# Altium PCB PCB1.PcbDoc (part 2 of 4)
Units mil, origin at the board's own origin, x right, y up, seen from the top; angles counter-clockwise.
Board outline 5315 x 3730 mil, 2 copper layers (Top Layer, Bottom Layer); 713 components, 554 nets, 2458 pads, 0 vias.
Unrouted connection lines stored in the file: 1728.
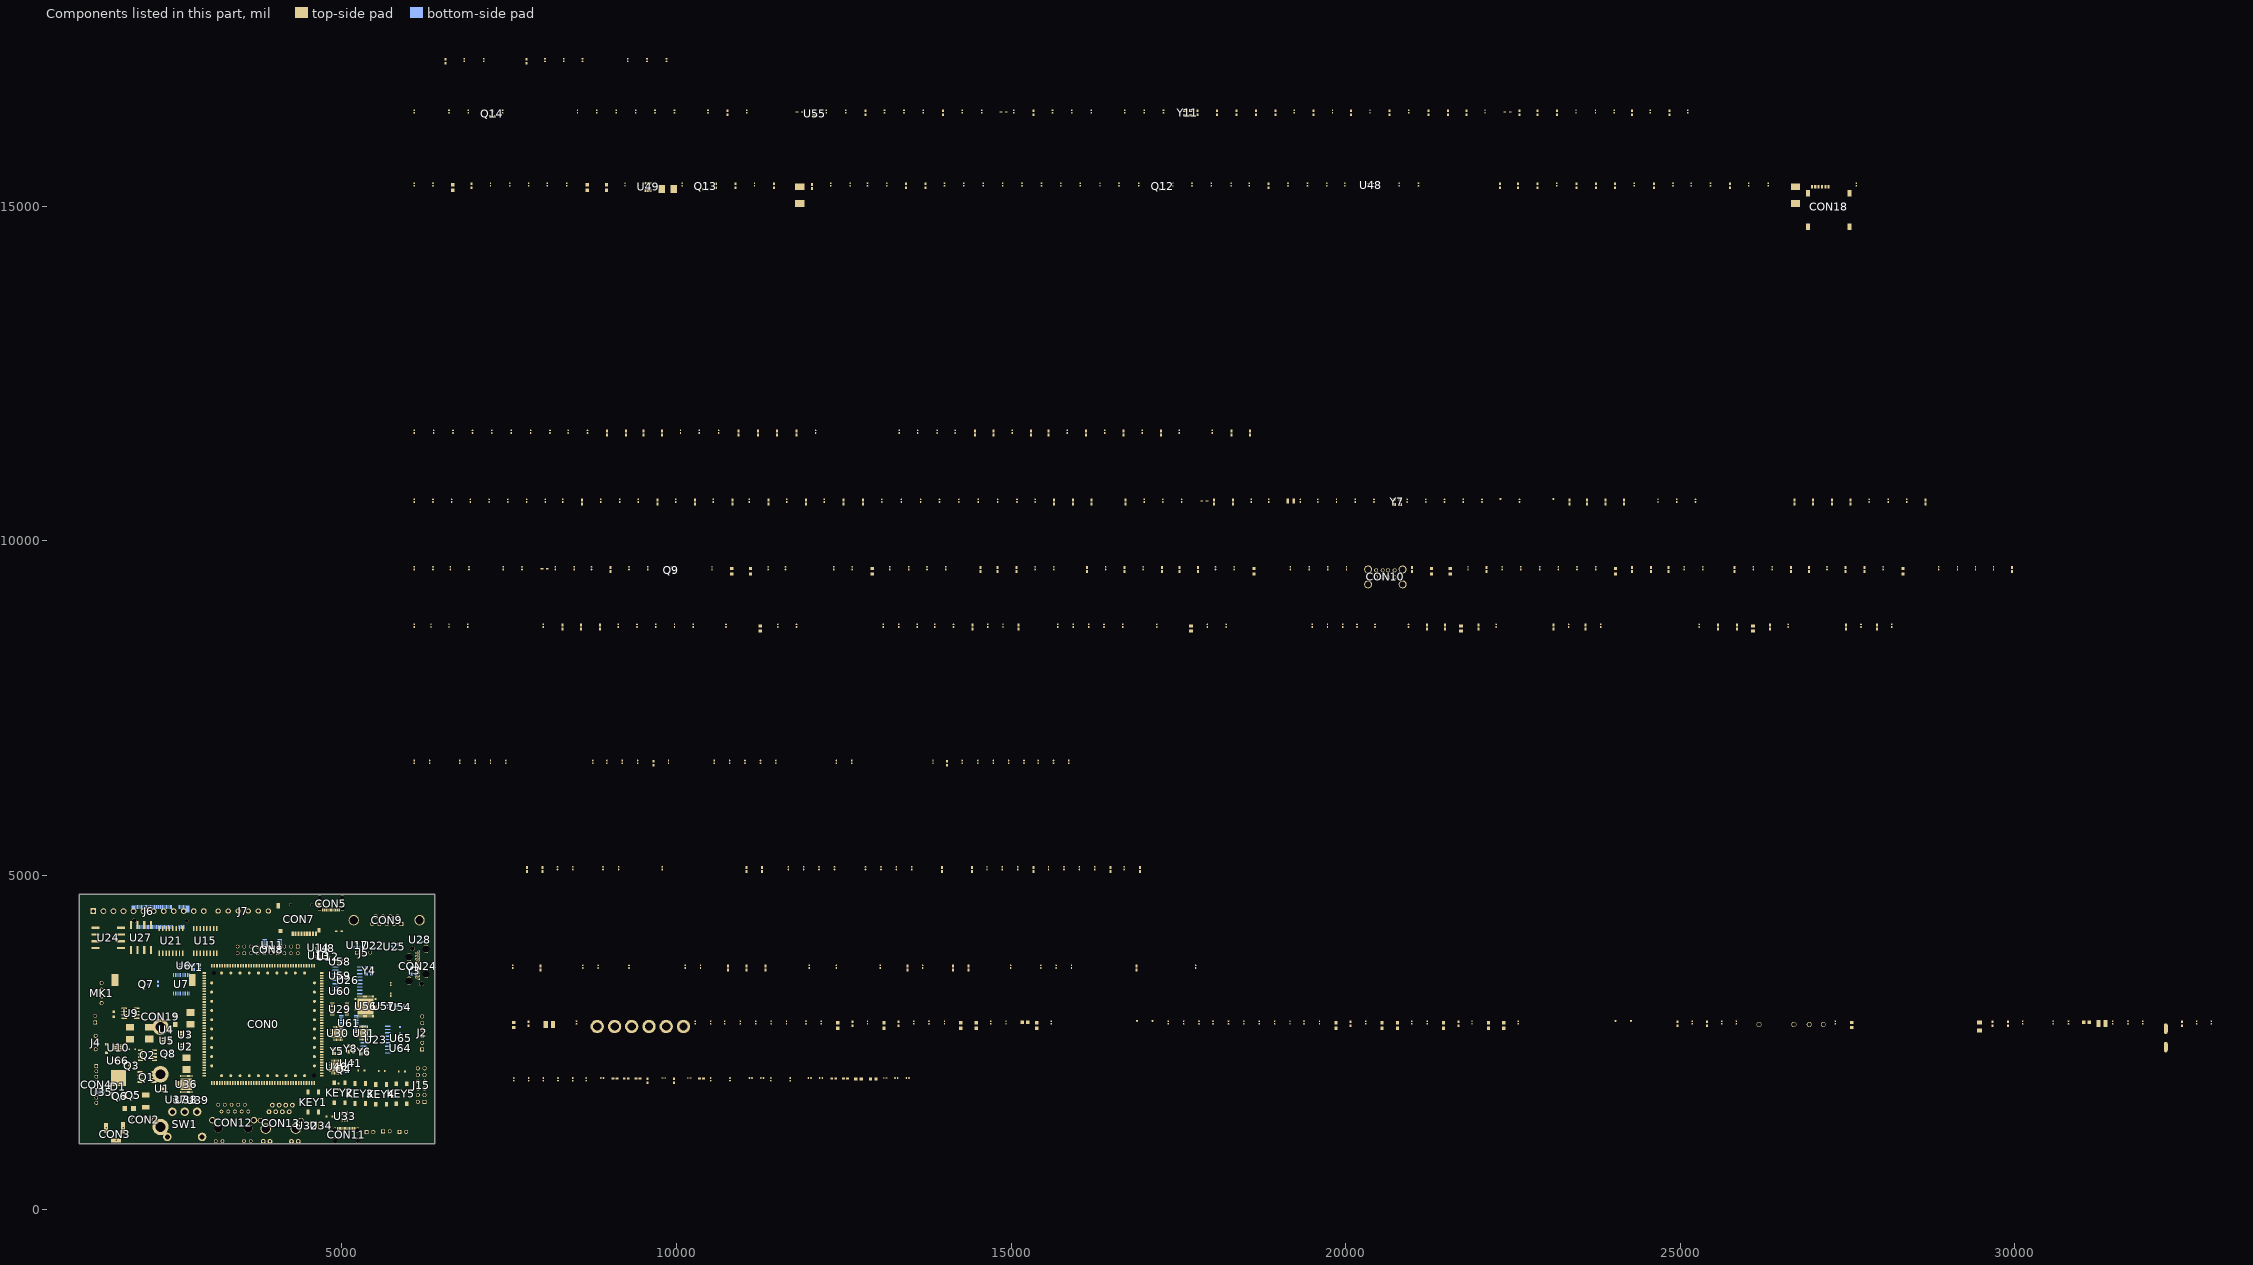
[diagram p2: the components of this part, seen from the top]

## Footprints (in the part's own frame and the unit in brackets; to place one, negate y for a bottom-side part, rotate by r counter-clockwise, add the part's x,y. Pads: shape width x height; smd on the part's side, far side on the other; paste and mask are expansions set on the pad) (continued)
D0603 [mil] "D0603"
  rect 40.2x29.9 smd: 1(-29.9,0) 2(29.9,0)
  silkscreen extent -60,-30 70,30
DFN2X2-8L [mil] "DFN2X2-8L"
  rect 10x20 smd: 1(-29.5,-39.4) 2(-9.8,-39.4) 3(9.8,-39.4) 4(29.5,-39.4) 5(29.5,39.4) 6(9.8,39.4) 7(-9.8,39.4) 8(-29.5,39.4)
  rect 70x40 smd: 9(0,0)
  silkscreen extent -47,-96 47,61
DFN-10-2510 [mil] "DFN-10-2510"
  rect 10x26 smd: 1(-39.4,-17.2) 5(39.4,-17.2) 6(39.4,17.2) 10(-39.4,17.2)
  rect 8x26 smd: 2(-19.7,-17.2) 4(19.7,-17.2) 7(19.7,17.2) 9(-19.7,17.2)
  rect 16x26 smd: 3(0,-17.2) 8(0,17.2)
  silkscreen extent -57,-67 57,41
DIP4_B0505S_1W [mil] "DIP4_B0505S_1W"
  round 59.1 hole 39.4: 1(-149.99,-82.7) 2(-49.99,-82.7) 3(50.01,-82.7) 4(150.01,-82.7)
  silkscreen extent -250,-140 228,118
DIP_CON_2D0MM_8P [mil] "DIP_CON_2D0MM_8P"
  rect 55x55 / inner round 55 / far side rect 55x55 hole 36: 1(275.6,-21.65)
  round 55 hole 36: 2(196.9,-21.65) 3(118.1,-21.65) 4(39.4,-21.65) 5(-39.4,-21.65) 6(-118.1,-21.65) 7(-196.9,-21.65) 8(-275.6,-21.65)
  silkscreen extent -359,-122 359,94
DIP_HDMI-A [mil] "DIP_HDMI-A"
  round 36 hole 22: 1(21.71,-49.25) 2(-17.69,-26.45) 3(21.71,-3.75) 4(-17.69,18.95) 5(21.71,41.75) 6(-17.69,64.45) 7(21.71,87.15) 8(-17.69,109.95) 9(21.71,132.65) 10(-17.69,155.45) 11(21.71,178.15) 12(-17.69,200.85) 13(21.71,223.65) 14(-17.69,246.35) 15(21.71,269.05) 16(-17.69,291.85) 17(21.71,314.55) 18(-17.69,337.25) 19(21.71,360.05)
  oval 56x126 hole 106 slot 36 at 0 deg: MTG1(-125.89,275.55) MTG2(129.91,397.65) MTG3(129.91,23.65) MTG4(-125.89,-78.75)
  round 67 hole 67 unplated: ""(-76.69,397.65) ""(61.11,-124.05)
  silkscreen extent -151,-459 156,451
F1206 [mil] "F1206"
  rrect11% 70.8x70.8 smd: 1(-65,0) 2(65,0)
  silkscreen extent -14,-35 14,35
header_1x2p_2d54_male [mil] "HEADER_1X2P_2D54_MALE"
  rect 54x54 / inner round 54 / far side rect 54x54 hole 40: 1(-50,0)
  round 54 hole 40: 2(50,0)
  silkscreen extent -101,-75 99,50
header_2x6_2d54_male [mil] "HEADER_2X6_2D54_MALE"
  rect 60x60 hole 40: 1(-250,-50)
  round 60 hole 40: 2(-250,50) 3(-150,-50) 4(-150,50) 5(-50,-50) 6(-50,50) 7(50,-50) 8(50,50) 9(150,-50) 10(150,50) 11(250,-50) 12(250,50)
  silkscreen extent -300,-148 300,100
KF2EDGR-3d81-12P [mil] "KF2EDGR-3D81-12P"
  rect 85x85 / inner round 85 / far side rect 85x85 hole 55: 1(825,129.9)
  round 85 hole 55: 2(675,129.9) 3(525,129.9) 4(375,129.9) 5(225,129.9) 6(75,129.9) 7(-75,129.9) 8(-225,129.9) 9(-375,129.9) 10(-525,129.9) 11(-675,129.9) 12(-825,129.9)
  silkscreen extent -916,-181 950,225
kf2eg_3_81-6p [mil] "KF2EG_3_81-6P"
  round 79.2 hole 49.2: 1(-375.1,105) 2(-225.1,105) 3(-75.1,105) 4(74.9,105) 5(224.9,105) 6(374.9,105)
  silkscreen extent -490,-206 466,180
KRJ-320DNL_14P [mil] "KRJ-320DNL_14P"
  round 55.1 hole 35.4: 1(-225,355.9) 2(-175,255.9) 3(-125,355.9) 4(-75,255.9) 5(-25,355.9) 6(25,255.9) 7(75,355.9) 8(125,255.9) 9(175,355.9) 10(225,255.9) 11(-261,-187) 12(-161,-187) 13(161,-187) 14(261,-187)
  round 126 hole 126 unplated: 15(-225,5.9) 16(225,5.9)
  round 98.4 hole 66.9: 17(310,126) 18(-310,126)
  silkscreen extent -315,-419 315,419
L0603 [mil] "L0603"
  rect 40.2x29.9 smd: 1(-30,0.5) 2(30,0.5)
  silkscreen extent -58,-24 58,25
MHOLE_C200D125 [mil] "MHOLE_C200D125"
  round 200 hole 125: 1(0.01,0)
micro-sim [mil] "MICRO-SIM"
  rect 61x102.4 smd: 1(-311,222.85) 2(-311,-276.45) 3(311,-276.45) 4(311,222.85)
  rect 31.5x53.2 smd: C1(-199.6,318.25) C2(-99.6,318.25) C3(0.4,318.25) C5(-249.6,318.25) C6(-149.6,318.25) C7(-49.6,318.25)
  silkscreen extent -340,-345 311,335
mol22-23-2031 [mil] "MOL22-23-2031"
  rect 54x54 / inner round 54 / far side rect 54x54 hole 40: 1(-100,-3)
  round 54 hole 40: 2(0,-3) 3(100,-3)
  silkscreen extent -187,-125 150,125
PSOPSOP-8L [mil] "PSOPSOP-8L"
  rect 25x75 smd: 1(-75.01,-104.3) 2(-25.01,-104.3) 3(24.99,-104.3) 4(74.99,-104.3) 5(74.99,104.3) 6(24.99,104.3) 7(-25.01,104.3) 8(-75.01,104.3)
  silkscreen extent -98,-177 98,79
QFN28_5x5 [mil] "QFN28_5X5"
  rect 10x35 smd: 1(-59.1,-95.1) 2(-39.4,-95.1) 3(-19.7,-95.1) 4(0,-95.1) 5(19.7,-95.1) 6(39.4,-95.1) 7(59.1,-95.1) 15(59.1,93.9) 16(39.4,93.9) 17(19.7,93.9) 18(0,93.9) 19(-19.7,93.9) 20(-39.4,93.9) 21(-59.1,93.9)
  rect 35x10 smd: 8(94.5,-59.7) 9(94.5,-40) 10(94.5,-20.3) 11(94.5,-0.6) 12(94.5,19.1) 13(94.5,38.8) 14(94.5,58.5) 22(-94.5,58.5) 23(-94.5,38.8) 24(-94.5,19.1) 25(-94.5,-0.6) 26(-94.5,-20.3) 27(-94.5,-40) 28(-94.5,-59.7)
  rect 128x128 smd: 29(0,-0.6)
  silkscreen extent -98,-144 99,97
QFN32 [mil] "QFN32"
  oval 10x33 smd: 1(-69.05,-93.69) 2(-49.35,-93.69) 3(-29.65,-93.69) 4(-9.95,-93.69) 5(9.65,-93.69) 6(29.35,-93.69) 7(49.05,-93.69) 8(68.75,-93.69) 17(68.75,94.31) 18(49.05,94.31) 19(29.35,94.31) 20(9.65,94.31) 21(-9.95,94.31) 22(-29.65,94.31) 23(-49.35,94.31) 24(-69.05,94.31)
  oval 33x10 smd: 9(93.85,-68.59) 10(93.85,-48.89) 11(93.85,-29.19) 12(93.85,-9.49) 13(93.85,10.11) 14(93.85,29.81) 15(93.85,49.51) 16(93.85,69.21) 25(-94.15,69.21) 26(-94.15,49.51) 27(-94.15,29.81) 28(-94.15,10.11) 29(-94.15,-9.49) 30(-94.15,-29.19) 31(-94.15,-48.89) 32(-94.15,-68.59)
  rect 131.9x131.9 smd: 33(-0.15,0.31)
  silkscreen extent -99,-141 98,99
QFN48 [mil] "QFN48"
  oval 8x32 smd: 1(-86.59,-118.1) 2(-70.89,-118.1) 3(-55.09,-118.1) 4(-39.39,-118.1) 5(-23.59,-118.1) 6(-7.89,-118.1) 7(7.91,-118.1) 8(23.61,-118.1) 9(39.41,-118.1) 10(55.11,-118.1) 11(70.91,-118.1) 12(86.61,-118.1) 25(86.61,118.1) 26(70.91,118.1) 27(55.11,118.1) 28(39.41,118.1) 29(23.61,118.1) 30(7.91,118.1) 31(-7.89,118.1) 32(-23.59,118.1) 33(-39.39,118.1) 34(-55.09,118.1) 35(-70.89,118.1) 36(-86.59,118.1)
  oval 32x8 smd: 13(118.11,-86.6) 14(118.11,-70.9) 15(118.11,-55.1) 16(118.11,-39.4) 17(118.11,-23.6) 18(118.11,-7.9) 19(118.11,7.9) 20(118.11,23.6) 21(118.11,39.4) 22(118.11,55.1) 23(118.11,70.9) 24(118.11,86.6) 37(-118.09,86.6) 38(-118.09,70.9) 39(-118.09,55.1) 40(-118.09,39.4) 41(-118.09,23.6) 42(-118.09,7.9) 43(-118.09,-7.9) 44(-118.09,-23.6) 45(-118.09,-39.4) 46(-118.09,-55.1) 47(-118.09,-70.9) 48(-118.09,-86.6)
  rect 173x173 smd: 49(0,0)
  silkscreen extent -182,-182 183,181
QFN64_LT8912B [mil] "QFN64_LT8912B"
  rect 31.9x7.9 smd: 1(-148.2,119.1) 2(-148.2,103.4) 3(-148.2,87.6) 4(-148.2,71.9) 5(-148.2,56.1) 6(-148.2,40.4) 7(-148.2,24.6) 8(-148.2,8.9) 9(-148.2,-6.9) 10(-148.2,-22.6) 11(-148.2,-38.4) 12(-148.2,-54.1) 13(-148.2,-69.9) 14(-148.2,-85.6) 15(-148.2,-101.4) 16(-148.2,-117.1) 33(147,-117.1) 34(147,-101.4) 35(147,-85.6) 36(147,-69.9) 37(147,-54.1) 38(147,-38.4) 39(147,-22.6) 40(147,-6.9) 41(147,8.9) 42(147,24.6) 43(147,40.4) 44(147,56.1) 45(147,71.9) 46(147,87.6) 47(147,103.4) 48(147,119.1)
  rect 7.9x31.9 smd: 17(-118.7,-146.6) 18(-103,-146.6) 19(-87.2,-146.6) 20(-71.5,-146.6) 21(-55.7,-146.6) 22(-40,-146.6) 23(-24.2,-146.6) 24(-8.5,-146.6) 25(7.3,-146.6) 26(23,-146.6) 27(38.8,-146.6) 28(54.5,-146.6) 29(70.3,-146.6) 30(86,-146.6) 31(101.8,-146.6) 32(117.5,-146.6) 49(117.5,148.6) 50(101.8,148.6) 51(86,148.6) 52(70.3,148.6) 53(54.5,148.6) 54(38.8,148.6) 55(23,148.6) 56(7.3,148.6) 57(-8.5,148.6) 58(-24.2,148.6) 59(-40,148.6) 60(-55.7,148.6) 61(-71.5,148.6) 62(-87.2,148.6) 63(-103,148.6) 64(-118.7,148.6)
  rect 244.1x244.1 smd: 65(-0.6,1)
  silkscreen extent -199,-147 147,149
QFN1616-12L [mil] "QFN1616-12L"
  rect 31x8 smd: 1(27.6,-8.5) 2(27.6,7.3) 7(-27.6,7.3) 8(-27.6,-8.5)
  rect 8x24 smd: 3(23.6,30.9) 4(7.9,30.9) 5(-7.9,30.9) 6(-23.6,30.9) 9(-23.6,-32.1) 10(-7.9,-32.1) 11(7.9,-32.1) 12(23.6,-32.1)
  silkscreen extent -32,-32 65,31
R0402 [mil] "R0402"
  oct 25x25 smd: 1(19.7,0) 2(-19.7,0)
  silkscreen extent -39,-20 39,20
R0603 [mil] "R0603"
  rect 40.2x29.9 smd: 1(30,0) 2(-30,0)
  silkscreen extent -59,-23 59,23
R0805 [mil] "R0805"
  rect 45x55 smd: 1(-37.5,0) 2(37.5,0)
  silkscreen extent -80,-35 80,35
R1210 [mil] "R1210"
  rect 59.1x98.4 smd: 1(-51.2,0) 2(51.2,0)
  silkscreen extent -87,-55 87,55
SC70-5-43M [mm] "SC70-5-43M"
  rect 0.95x0.401 smd: 1(-1.074,0.65) 2(-1.074,0) 3(-1.074,-0.65) 4(1.074,-0.65) 5(1.074,0.65)
  silkscreen extent -2.35,-1.1 1.8,1.1
SMB [mil] "SMB"
  rect 70x110 smd: 1(-90,0) 2(90,0)
  silkscreen extent -140,-80 140,80
SMD-L2520M-2P [mil] "SMD-L2520M-2P"
  rect 39.4x78.7 smd: 1(-43.3,0) 2(43.3,0)
  silkscreen extent -69,-45 69,45
SMD_200P_45x45_TL3562 [mil] "SMD_200P_45X45_TL3562"
  rect 24x55 smd: 1(-767.72,-877.95) 2(-728.35,-877.95) 3(-688.98,-877.95) 4(-649.61,-877.95) 5(-610.24,-877.95) 6(-570.87,-877.95) 7(-531.5,-877.95) 8(-492.13,-877.95) 9(-452.76,-877.95) 10(-413.39,-877.95) 11(-374.02,-877.95) 12(-334.65,-877.95) 13(-295.28,-877.95) 14(-255.91,-877.95) 15(-216.54,-877.95) 16(-177.17,-877.95) 17(-137.8,-877.95) 18(-98.43,-877.95) 19(-59.06,-877.95) 20(-19.69,-877.95) 21(19.68,-877.95) 22(59.05,-877.95) 23(98.42,-877.95) 24(137.79,-877.95) 25(177.17,-877.95) 26(216.54,-877.95) 27(255.91,-877.95) 28(295.28,-877.95) 29(334.65,-877.95) 30(374.02,-877.95) 31(413.39,-877.95) 32(452.76,-877.95) 33(492.13,-877.95) 34(531.5,-877.95) 35(570.87,-877.95) 36(610.24,-877.95) 37(649.61,-877.95) 38(688.98,-877.95) 39(728.35,-877.95) 40(767.72,-877.95) 81(767.72,877.95) 82(728.35,877.95) 83(688.98,877.95) 84(649.61,877.95) 85(610.24,877.95) 86(570.87,877.95) 87(531.5,877.95) 88(492.13,877.95) 89(452.76,877.95) 90(413.39,877.95) 91(374.02,877.95) 92(334.65,877.95) 93(295.28,877.95) 94(255.91,877.95) 95(216.54,877.95) 96(177.17,877.95) 97(137.79,877.95) 98(98.42,877.95) 99(59.05,877.95) 100(19.68,877.95) 101(-19.69,877.95) 102(-59.06,877.95) 103(-98.43,877.95) 104(-137.8,877.95) 105(-177.17,877.95) 106(-216.54,877.95) 107(-255.91,877.95) 108(-295.28,877.95) 109(-334.65,877.95) 110(-374.02,877.95) 111(-413.39,877.95) 112(-452.76,877.95) 113(-492.13,877.95) 114(-531.5,877.95) 115(-570.87,877.95) 116(-610.24,877.95) 117(-649.61,877.95) 118(-688.98,877.95) 119(-728.35,877.95) 120(-767.72,877.95)
  rect 55x24 smd: 41(877.95,-767.72) 42(877.95,-728.35) 43(877.95,-688.98) 44(877.95,-649.61) 45(877.95,-610.24) 46(877.95,-570.87) 47(877.95,-531.5) 48(877.95,-492.13) 49(877.95,-452.76) 50(877.95,-413.39) 51(877.95,-374.02) 52(877.95,-334.65) 53(877.95,-295.28) 54(877.95,-255.91) 55(877.95,-216.54) 56(877.95,-177.17) 57(877.95,-137.79) 58(877.95,-98.42) 59(877.95,-59.05) 60(877.95,-19.68) 61(877.95,19.69) 62(877.95,59.06) 63(877.95,98.43) 64(877.95,137.8) 65(877.95,177.17) 66(877.95,216.54) 67(877.95,255.91) 68(877.95,295.28) 69(877.95,334.65) 70(877.95,374.02) 71(877.95,413.39) 72(877.95,452.76) 73(877.95,492.13) 74(877.95,531.5) 75(877.95,570.87) 76(877.95,610.24) 77(877.95,649.61) 78(877.95,688.98) 79(877.95,728.35) 80(877.95,767.72) 121(-877.95,767.72) 122(-877.95,728.35) 123(-877.95,688.98) 124(-877.95,649.61) 125(-877.95,610.24) 126(-877.95,570.87) 127(-877.95,531.5) 128(-877.95,492.13) 129(-877.95,452.76) 130(-877.95,413.39) 131(-877.95,374.02) 132(-877.95,334.65) 133(-877.95,295.28) 134(-877.95,255.91) 135(-877.95,216.54) 136(-877.95,177.17) 137(-877.95,137.8) 138(-877.95,98.43) 139(-877.95,59.06) 140(-877.95,19.69) 141(-877.95,-19.68) 142(-877.95,-59.05) 143(-877.95,-98.42) 144(-877.95,-137.79) 145(-877.95,-177.17) 146(-877.95,-216.54) 147(-877.95,-255.91) 148(-877.95,-295.28) 149(-877.95,-334.65) 150(-877.95,-374.02) 151(-877.95,-413.39) 152(-877.95,-452.76) 153(-877.95,-492.13) 154(-877.95,-531.5) 155(-877.95,-570.87) 156(-877.95,-610.24) 157(-877.95,-649.61) 158(-877.95,-688.98) 159(-877.95,-728.35) 160(-877.95,-767.72)
  round 44 smd: 161(-620.08,-767.72) 162(-482.28,-767.72) 163(-344.49,-767.72) 164(-206.69,-767.72) 165(-68.9,-767.72) 166(68.9,-767.72) 167(206.69,-767.72) 168(344.49,-767.72) 169(482.28,-767.72) 170(620.08,-767.72) 171(767.72,-620.08) 172(767.72,-482.28) 173(767.72,-344.49) 174(767.72,-206.69) 175(767.72,-68.9) 176(767.72,68.9) 177(767.72,206.69) 178(767.72,344.49) 179(767.72,482.28) 180(767.72,620.08) 181(620.08,767.72) 182(482.28,767.72) 183(344.49,767.72) 184(206.69,767.72) 185(68.9,767.72) 186(-68.9,767.72) 187(-206.69,767.72) 188(-344.49,767.72) 189(-482.28,767.72) 190(-620.08,767.72) 191(-767.72,620.08) 192(-767.72,482.28) 193(-767.72,344.49) 194(-767.72,206.69) 195(-767.72,68.9) 196(-767.72,-68.9) 197(-767.72,-206.69) 198(-767.72,-344.49) 199(-767.72,-482.28) 200(-767.72,-620.08)
  round 20 hole 59 unplated: ""(-735.74,765.85) ""(762.26,-764.15)
  silkscreen extent -886,-886 886,886
SMD_2012 [mil] "SMD_2012"
  rect 39.4x43.3 smd: 1(-37.4,-0.2) 2(37.4,-0.2)
  silkscreen extent -63,-30 63,29
SMD_3225 [mil] "SMD_3225"
  rect 51.2x43.3 smd: 1(-45.29,-35.41) 2(45.31,-35.41) 3(45.31,35.39) 4(-45.29,35.39)
  silkscreen extent -90,-49 63,49
SMD_CSAB0518 [mil] "SMD_CSAB0518"
  rect 100x120 smd: 1(-88.6,0) 2(88.6,0)
  silkscreen extent -106,-106 106,106
SOD323_BI [mil] "SOD323_BI"
  rect 27.6x27.6 smd: 1(-45.3,0.1) 2(45.3,0.1)
  silkscreen extent -55,-27 48,27
SOD-123_NEW [mil] "SOD-123_NEW"
  rect 36x48 smd: 1(-65,0.5) 2(65,0.5)
  silkscreen extent -56,-36 56,36
SOD-323 [mil] "SOD-323"
  rect 40x20 smd: 1(39.9,-1.2) 2(-39.6,-1.2)
  silkscreen extent -76,-29 36,46
SOIC8_D8 [mil] "SOIC8_D8"
  rect 78.7x19.7 smd: 1(-94.5,75) 2(-94.5,25) 3(-94.5,-25) 4(-94.5,-75) 5(94.5,-75) 6(94.5,-25) 7(94.5,25) 8(94.5,75)
  silkscreen extent -165,-79 39,90
SOIC16 [mil] "SOIC16"
  rect 77x22 smd: 1(-185,173) 2(-185,123) 3(-185,73) 4(-185,23) 5(-185,-27) 6(-185,-77) 7(-185,-127) 8(-185,-177) 9(185.1,-177) 10(185.1,-127) 11(185.1,-77) 12(185.1,-27) 13(185.1,23) 14(185.1,73) 15(185.1,123) 16(185.1,173)
  silkscreen extent -265,-217 118,224
SOIC18 [mil] "SOIC18"
  rect 86.6x19.7 smd: 1(-181.1,199.99) 2(-181.1,149.99) 3(-181.1,99.99) 4(-181.1,49.99) 5(-181.1,-0.01) 6(-181.1,-50.01) 7(-181.1,-100.01) 8(-181.1,-150.01) 9(-181.1,-200.01) 10(181.1,-200.01) 11(181.1,-150.01) 12(181.1,-100.01) 13(181.1,-50.01) 14(181.1,-0.01) 15(181.1,49.99) 16(181.1,99.99) 17(181.1,149.99) 18(181.1,199.99)
  silkscreen extent -260,-229 147,229
SOP8 [mil] "SOP8"
  rect 120x32 smd: 1(-189,150) 2(-189,50) 3(-189,-50) 4(-189,-150) 5(189,-150) 6(189,-50) 7(189,50) 8(189,150)
  silkscreen extent -300,-188 255,188
SOP8-20-91 [mil] "SOP8-20-91"
  rect 10x37 smd: 1(29.3,55.3) 2(9.6,55.3) 3(-10,55.3) 4(-29.7,55.3) 5(-29.7,-55.7) 6(-10,-55.7) 7(9.6,-55.7) 8(29.3,-55.7)
  silkscreen extent -40,-46 39,98
SOT23-3 [mil] "SOT23-3"
  rect 30x30 smd: 1(-35,37.5) 2(-35,-37.5) 3(35,0.5)
  silkscreen extent -85,-58 25,58
SOT23-3_DBZ3 [mil] "SOT23-3_DBZ3"
  rect 25.6x40 smd: 1(-37.4,-39.4) 2(37.4,-39.4) 3(0,39.4)
  silkscreen extent -87,-52 60,28
SOT23-5 [mil] "SOT23-5"
  rect 25x50 smd: 1(-37.4,-49.19) 2(0,-49.19) 3(37.4,-49.19) 4(37.4,49.21) 5(-37.4,49.21)
  silkscreen extent -88,-79 60,34
sot23_8 [mil] "SOT23_8"
  rect 16.5x51.2 smd: 1(-38.05,-46.35) 2(-12.45,-46.35) 3(13.15,-46.35) 4(38.75,-46.35) 5(38.75,46.25) 6(13.15,46.25) 7(-12.45,46.25) 8(-38.05,46.25)
  silkscreen extent -55,-105 52,75
SOT363 [mil] "SOT363"
  rect 19.7x11.8 smd: 1(-37.5,24.5) 2(-37.5,-1.1) 3(-37.5,-26.7) 4(37.3,-26.7) 5(37.3,-1.1) 6(37.3,24.5)
  silkscreen extent -80,-32 22,40
SOT-23-6L [mil] "SOT-23-6L"
  rect 24x44 smd: 1(-37.59,-53.19) 2(-0.19,-53.19) 3(37.21,-53.19) 4(37.21,53.21) 5(-0.19,53.21) 6(-37.59,53.21)
  silkscreen extent -76,-88 61,39
sw-126_76 [mil] "SW-126_76"
  round 126 hole 76: 1(-185,170) 2(0,170) 3(185,170) 4(-260,-205.2) 5(260,-205.2)
  silkscreen extent -325,-270 325,310
TO-252 [mil] "TO-252"
  rect 50x105 smd: 1(-90.2,-165.8) 3(90.2,-165.8)
  rect 220x235 smd: 2(0,98)
  silkscreen extent -132,-248 132,156
TP30 [mil] "TP30"
  round 30 smd: 1(0,0)
TP_DIP [mil] "TP_DIP"
  round 74.8 hole 59.1: 1(0,0)
  silkscreen extent -69,-69 69,69
TS-1158B-B-B-W [mil] "TS-1158B-B-B-W"
  rect 71x47 smd: 1(-148.4,79.1) 2(148.8,79.1) 3(-148.4,-78.3) 4(148.8,-78.3)
  silkscreen extent -128,-126 128,126
TSSOP16 [mil] "TSSOP16"
  rect 65x13 smd: 1(-113,89.6) 2(-113,64) 3(-113,38.4) 4(-113,12.8) 5(-113,-12.8) 6(-113,-38.4) 7(-113,-64) 8(-113,-89.6) 9(113,-89.6) 10(113,-64) 11(113,-38.4) 12(113,-12.8) 13(113,12.8) 14(113,38.4) 15(113,64) 16(113,89.6)
  silkscreen extent -185,-100 80,105
TSSOP16_PW16 [mil] "TSSOP16_PW16"
  rect 63x11.8 smd: 1(-110.2,89.6) 2(-110.2,64) 3(-110.2,38.4) 4(-110.2,12.8) 5(-110.2,-12.8) 6(-110.2,-38.4) 7(-110.2,-64) 8(-110.2,-89.6) 9(110.2,-89.6) 10(110.2,-64) 11(110.2,-38.4) 12(110.2,-12.8) 13(110.2,12.8) 14(110.2,38.4) 15(110.2,64) 16(110.2,89.6)
  silkscreen extent -180,-79 59,105
TSSOP24 [mil] "TSSOP24"
  rect 65x13 smd: 1(-113,135.8) 2(-113,110.2) 3(-113,84.6) 4(-113,59) 5(-113,33.4) 6(-113,7.8) 7(-113,-17.8) 8(-113,-43.4) 9(-113,-69) 10(-113,-94.6) 11(-113,-120.2) 12(-113,-145.8) 13(113,-145.8) 14(113,-120.2) 15(113,-94.6) 16(113,-69) 17(113,-43.4) 18(113,-17.8) 19(113,7.8) 20(113,33.4) 21(113,59) 22(113,84.6) 23(113,110.2) 24(113,135.8)
  silkscreen extent -180,-160 80,150
TSSOP-20 [mil] "TSSOP-20"
  rect 65x13 smd: 1(-140,115.2) 2(-140,89.6) 3(-140,64) 4(-140,38.4) 5(-140,12.8) 6(-140,-12.8) 7(-140,-38.4) 8(-140,-64) 9(-140,-89.6) 10(-140,-115.2) 11(136,-115.2) 12(136,-89.6) 13(136,-64) 14(136,-38.4) 15(136,-12.8) 16(136,12.8) 17(136,38.4) 18(136,64) 19(136,89.6) 20(136,115.2)
  silkscreen extent -205,-145 93,145
TYPE-C_16P_90_SMD [mil] "TYPE-C_16P_90_SMD"
  oval 39x82 hole 67 slot 24 at 0 deg: 1(-171.25,115.5) 2(168.95,115.5)
  oval 39x70 hole 55 slot 24 at 0 deg: 3(-171.25,-47.9) 4(168.95,-47.9)
  rect 11x45 smd: A1(-132.65,138.2) A4(-101.15,138.2) A5(-50.35,138.2) A6(-10.95,138.2) A7(8.65,138.2) A8(48.05,138.2) A9(98.85,138.2) A12(130.35,138.2) B1(119.35,138.2) B4(87.85,138.2) B5(67.75,138.2) B6(28.35,138.2) B7(-30.65,138.2) B8(-70.05,138.2) B9(-90.15,138.2) B12(-121.65,138.2)
  round 20 hole 26 unplated: ""(-114.95,95.8) ""(112.65,95.8)
  silkscreen extent -185,-150 175,195
WLCSP-36-0d4mm [mil] "WLCSP-36-0D4MM"
  oval 6x9 smd: A1(-39.2,-39.4) A3(-39.2,-7.9) A4(-39.2,7.9) A6(-39.2,39.4) B1(-23.4,-39.4) B6(-23.4,39.4) C1(-7.7,-39.4) C6(-7.7,39.4) D1(8.1,-39.4) D6(8.1,39.4) E1(23.8,-39.4) E6(23.8,39.4) F1(39.6,-39.4) F3(39.6,-7.9) F4(39.6,7.9) F6(39.6,39.4)
  oval 9x6 smd: A2(-39.2,-23.6) A5(-39.2,23.6) F2(39.6,-23.6) F5(39.6,23.6)
  round 8 smd: B2(-23.4,-23.6) B3(-23.4,-7.9) B4(-23.4,7.9) B5(-23.4,23.6) C2(-7.7,-23.6) C3(-7.7,-7.9) C4(-7.7,7.9) C5(-7.7,23.6) D2(8.1,-23.6) D3(8.1,-7.9) D4(8.1,7.9) D5(8.1,23.6) E2(23.8,-23.6) E3(23.8,-7.9) E4(23.8,7.9) E5(23.8,23.6)
  silkscreen extent -53,-53 47,47

## Part data
C1 C2: library part "CAP NP_Dup3", "贴片陶瓷电容,680pF,5%,50V,COG", Dielectric=C0G, Manufacturer Character=中国大陆, Manufacturer PN=C1005C0G1H681J050BA, Operation Temperature（℃）=-55~125℃, Tolerance=5%, Voltage=50V, As-Welded=/, Created by=JJJ, Part Type=C0402, PCB Footprint=C0603, Priority=A, RK PN=C1005C0G1H681J050BA
C3 C4: library part "CAP NP_Dup3", "贴片陶瓷电容,100nF,10%,25V,X5R", Dielectric=X5R, Manufacturer Character=中国大陆, Manufacturer PN=C1005X5R1A104K050BA, Operation Temperature（℃）=-55~85℃, Tolerance=10%, Voltage=10V, As-Welded=/, Created by=JJJ, Part Type=C0402, PCB Footprint=C0402, Priority=A, RK PN=C1005X5R1A104K050BA
C5 C6: library part "CAP NP", "贴片陶瓷电容,22uF,20%,25V,X5R", Dielectric=X5R, Manufacturer Character=中国大陆, Manufacturer PN=C2012X5R1A226K125AB, Operation Temperature（℃）=-55~85℃, Tolerance=10%, Voltage=10V, As-Welded=/, Created by=JJJ, Part Type=C0805, PCB Footprint=C0805, Priority=A, RK PN=C2012X5R1A226K125AB
C7: library part "CAP NP", "贴片陶瓷电容,100nF,10%,25V,X5R", Dielectric=X5R, Manufacturer Character=中国大陆, Manufacturer PN=C1005X5R1A104K050BA, Operation Temperature（℃）=-55~85℃, Tolerance=10%, Voltage=10V, As-Welded=/, Created by=JJJ, Part Type=C0402, PCB Footprint=C0402, Priority=A, RK PN=C1005X5R1A104K050BA
C8 C9: library part "CAP NP_Dup3", "贴片陶瓷电容,33pF,5%,50V,COG", Dielectric=C0G, Manufacturer Character=中国大陆, Manufacturer PN=C1005C0G1H270J050BA, Operation Temperature（℃）=-55~125℃, Tolerance=5%, Voltage=50V, As-Welded=/, Created by=JJJ, Option=DNP, Part Type=C0402, PCB Footprint=C0603, Priority=A, RK PN=C1005C0G1H270J050BA
C10 C23 C27 C28 C30 C33 C34 C37 C41 C42 C48 C49 C113 C124 C125 C127 C264 C268 C269: library part "CAP NP_Dup3", "贴片陶瓷电容,22uF,20%,25V,X5R", Manufacturer Character=中国大陆, Operation Temperature（℃）=-55~85℃, Temperature=-55~125℃, As-Welded=/, PCB Footprint=C0805
  C113 C124 C125 C127: room="USB HUB"
C11 C20 C21 C26 C29 C32 C35 C36 C39 C43 C58 C59 C62 C66 C67 C71 C74 C78 C86 C95 C97 C108 C109 C110 C111 C112 C114 C115 C116 C126 C128 C129 C130 C246 C254 C255 C257 C260 C263 C266 C270 C329 C331 C334 C335: library part "CAP NP_Dup3", "贴片陶瓷电容,100nF,10%,25V,X5R", Manufacturer Character=中国大陆, Operation Temperature（℃）=-55~85℃, Temperature=-55~125℃, As-Welded=/, PCB Footprint=C0402
  C11: room=DCIN
  C78 C86: room=6
  C95 C97: room=17
  C108 C109 C110 C111 C112: room=RS232
  C114 C115 C116 C126 C128 C129 C130: room="USB HUB"
C12 C24 C31 C38 C46 C118 C132 C153 C157 C253 C265: library part "CAP NP_Dup3", "贴片陶瓷电容,1uF,10%,25V,X5R", Manufacturer Character=中国大陆, Operation Temperature（℃）=-55~85℃, PCB Footprint=C0603
  C12 C24 C31 C38 C157 C253 C265: As-Welded=/
  C46: As-Welded=/, Characteristic=<Characteristic>
  C118 C132: As-Welded=/, room="USB HUB"
  C153: As-Welded=DNP
C13: library part "CAP POL_Dup1", "贴片式铝电解电容,220uF,20%,35V", Manufacturer=东莞市合粤电子有限公司（Heyue）, Manufacturer Character=中国大陆, Manufacturer PartNumber=RVT1V221M0810VG, Operation Temperature（℃）=-55~105℃, As-Welded=/, PCB Footprint=cap_alu_smd_8x10d5, room=DCIN, Temperature=-55~105℃
C14 C64 C65 C79 C82 C87 C88: library part "CAP NP_Dup3", "贴片陶瓷电容,22pF,5%,50V,C0G", Manufacturer Character=中国大陆, Operation Temperature（℃）=-55~125℃, As-Welded=/, PCB Footprint=C0603, Temperature=-55~125℃
  C79 C82 C87 C88: room=6
C15: library part "CAP NP_Dup3", "贴片陶瓷电容,2.2uF,20%,25V,Y5V", Manufacturer Character=中国大陆, Operation Temperature（℃）=-20~85℃, As-Welded=/, PCB Footprint=C1206
C16 C18 C159 C161 C163 C165 C336: library part "CAP NP_Dup3", "贴片陶瓷电容,10uF,10%,10V,X5R", Manufacturer Character=中国大陆, Operation Temperature（℃）=-55~85℃, As-Welded=/, PCB Footprint=C0603
C17 C19 C56 C75 C76 C143 C144 C145 C147 C148 C151 C152 C154 C155 C156 C158 C160 C162 C164 C166 C243 C256 C337: library part "CAP NP_Dup3", "贴片陶瓷电容,100nF,10%,25V,X5R", Manufacturer Character=中国大陆, Operation Temperature（℃）=-55~85℃, As-Welded=/, PCB Footprint=C0402
  C243 C256: room="USB HUB"
C22 C25 C40 C267 C340: library part "CAP NP_Dup3", "贴片陶瓷电容,15pF,5%,50V,COG", Manufacturer Character=中国大陆, Operation Temperature（℃）=-55~125℃, As-Welded=/, PCB Footprint=C0402, Temperature=-55~125℃
C44: library part "CAP NP_Dup3", "贴片陶瓷电容,22uF,20%,25V,X5R", Manufacturer Character=中国大陆, Operation Temperature（℃）=-55~85℃, Temperature=-55~155℃, As-Welded=/, Characteristic=<Characteristic>, PCB Footprint=C0805
C45 C47 C50 C70: library part "CAP NP_Dup3", "贴片陶瓷电容,100nF,10%,25V,X5R", Manufacturer Character=中国大陆, Operation Temperature（℃）=-55~85℃, Temperature=-55~155℃, As-Welded=/, PCB Footprint=C0402
  C45 C47 C50: Characteristic=<Characteristic>
C51: library part "CAP NP_Dup3", "贴片陶瓷电容,1nF,10%,2KV,X7R", Manufacturer Character=中国大陆, Operation Temperature（℃）=-55~125℃, Temperature=–55~125℃, As-Welded=/, PCB Footprint=C1210
C52 C53 C54 C55 C57: library part "CAP NP_Dup2", "贴片陶瓷电容,10nF,10%,50V,X7R", Manufacturer Character=中国大陆, Operation Temperature（℃）=-55~125℃, As-Welded=/, PCB Footprint=C0402, room=KEY
  C54 C55 C57: Temperature=-55~125℃
C60 C249: library part "CAP NP_Dup3", "贴片陶瓷电容,10nF,10%,50V,X7R", Manufacturer Character=中国大陆, Operation Temperature（℃）=-55~125℃, Temperature=–55~125℃, As-Welded=/, PCB Footprint=C0402
C61 C63 C72 C73 C77 C85 C96 C98 C107 C247 C261: library part "CAP NP_Dup3", "贴片陶瓷电容,10uF,10%,10V,X5R", Manufacturer Character=中国大陆, Operation Temperature（℃）=-55~85℃, Temperature=-55~125℃, As-Welded=/, PCB Footprint=C0603
  C77 C85 C96 C98 C247 C261: room=6
  C107: room=RS232
C68 C69: library part "CAP NP_Dup3", "贴片陶瓷电容,18pF,5%,50V,C0G", Manufacturer Character=中国大陆, Operation Temperature（℃）=-55~125℃, Temperature=-40~125℃, As-Welded=DNP, PCB Footprint=C0603
C89 C90 C91 C94 C99 C100 C101 C106 C138 C141 C142: library part "CAP NP_Dup1", "贴片陶瓷电容,100nF,10%,25V,X5R", Manufacturer Character=中国大陆, Operation Temperature（℃）=-55~85℃, Temperature=-55~125℃, As-Welded=/, PCB Footprint=C0402
  C138 C141: room=DRDUSB
  C142: room="USB HUB"
C92 C93 C102 C103: library part "CAP NP_Dup1", "贴片陶瓷电容,15pF,5%,50V,COG", Manufacturer Character=中国大陆, Operation Temperature（℃）=-55~125℃, As-Welded=/, PCB Footprint=C0402, Temperature=-55~125℃
C104 C105: library part "CAP NP_Dup1", "贴片陶瓷电容,33pF,5%,50V,COG", Manufacturer Character=中国大陆, Operation Temperature（℃）=-55~125℃, As-Welded=/, PCB Footprint=C0603, Temperature=-55~125℃
C117 C119 C131 C133: library part "CAP NP_Dup3", "贴片陶瓷电容,22pF,5%,50V,COG", Manufacturer Character=中国大陆, Operation Temperature（℃）=-55~125℃, As-Welded=DNP, PCB Footprint=C0603, room="USB HUB", Temperature=-55~125℃
C120 C122 C123 C134 C135 C136: library part "CAP NP_Dup3", "100nF,10%,C0402,25V", Manufacturer Character=中国大陆, Operation Temperature（℃）=-40~85℃, Temperature=-55~125℃, As-Welded=DNP, PCB Footprint=C0402, room="USB HUB"
C121 C137: library part "CAP NP_Dup3", "贴片陶瓷电容,22uF,10%,16V,X5R", Manufacturer Character=中国大陆, Operation Temperature（℃）=-55~85℃, Temperature=-55~125℃, As-Welded=DNP, PCB Footprint=C0805, room="USB HUB"
C139 C140: library part "CAP NP_Dup1", "贴片陶瓷电容,22uF,20%,25V,X5R", Manufacturer Character=中国大陆, Operation Temperature（℃）=-55~85℃, Temperature=-55~125℃, As-Welded=/, PCB Footprint=C0805, room=DRDUSB
C146 C149: library part "CAP NP_Dup3", "贴片陶瓷电容,12pF,5%,50V,COG", Manufacturer Character=中国大陆, Operation Temperature（℃）=-55~125℃, As-Welded=/, PCB Footprint=C0402
C150: library part "CAP NP_Dup3", "贴片陶瓷电容,4.7uF,10%,25V,X5R", Manufacturer Character=中国大陆, Operation Temperature（℃）=-55~85℃, As-Welded=/, PCB Footprint=C0603
C167 C168: library part "CAP NP_2", "贴片陶瓷电容,12pF,5%,50V,COG", Manufacturer Character=中国大陆, Operation Temperature（℃）=-55~125℃, As-Welded=/, PCB Footprint=C0402, room=10
C169 C172: library part "CAP NP_2", "贴片陶瓷电容,10uF,10%,10V,X5R", Manufacturer Character=中国大陆, Operation Temperature（℃）=-55~85℃, As-Welded=/, PCB Footprint=C0603, room=10
C170 C173 C175 C177 C179: library part "CAP NP_2", "贴片陶瓷电容,100nF,10%,25V,X5R", Manufacturer Character=中国大陆, Operation Temperature（℃）=-55~85℃, As-Welded=/, PCB Footprint=C0402, room=10
C171 C174 C176 C178: library part "CAP NP_2", "贴片陶瓷电容,1uF,10%,25V,X5R", Manufacturer Character=中国大陆, Operation Temperature（℃）=-55~85℃, As-Welded=/, PCB Footprint=C0603, room=10
C180 C181 C182 C183: library part "CAP NP_3", "贴片陶瓷电容,15pF,5%,50V,COG", Manufacturer Character=中国大陆, Operation Temperature（℃）=-55~125℃, As-Welded=DNP, PCB Footprint=C0603, room=ecat1, Temperature=-55~125℃
C184: library part "CAP NP_3", "贴片陶瓷电容,100nF,10%,25V,X5R", Manufacturer Character=中国大陆, Operation Temperature（℃）=-55~85℃, Temperature=-55~125℃, As-Welded=/, PCB Footprint=C0402, room=ecat1
C244 C258: library part "CAP NP_Dup3", "贴片陶瓷电容,10pF,5%,50V,COG", Manufacturer Character=中国大陆, Operation Temperature（℃）=-55~125℃, As-Welded=/, PCB Footprint=C0603, Temperature=-55~125℃
C245 C259: library part "CAP NP_Dup3", "贴片陶瓷电容,33pF,5%,50V,COG", Manufacturer Character=中国大陆, Operation Temperature（℃）=-55~125℃, As-Welded=/, PCB Footprint=C0603, Temperature=-55~125℃
C248 C262: library part "CAP POL_Dup1", "D型钽电容,220uF,10%,10V", Manufacturer=湖南湘怡中元科技有限公司（XIANGYEE）, Manufacturer Character=中国大陆, Manufacturer PartNumber=CA45-D010K227T, Operation Temperature（℃）=-55~125℃, As-Welded=/, PCB Footprint=CAP_CASE_D, Temperature=-55~125℃
C250 C251 C252: library part "CAP NP_Dup3", "贴片陶瓷电容,33pF,5%,50V,COG", Manufacturer Character=中国大陆, Operation Temperature（℃）=-55~125℃, Temperature=-55~155℃, As-Welded=DNP, PCB Footprint=C0603
C308 C312 C314 C316 C317 C320 C322 C324 C326: library part CAP_NP0603, "贴片陶瓷电容,10uF,10%,10V,X5R", Manufacturer Character=中国大陆, Operation Temperature（℃）=-55~85℃, Part Number=117-00-3043, As-Welded=/, Create Date=20130122, Designer=Hujin, Part Status="On Hand", Part Type=CAPACITOR, PCB Footprint=C0603, PCB Footprint Status=Checked, Price=0.1, Purchase Information="13510796878 伊美尔电子", Standard PCB Footprint=0603
C309 C310 C311 C313 C315 C318 C319 C321 C323 C325 C330: library part CAP_NP0603, "贴片陶瓷电容,100nF,10%,25V,X5R", Manufacturer Character=中国大陆, Operation Temperature（℃）=-55~85℃, Part Number=117-00-3036, As-Welded=/, Create Date=20130122, Designer=Hujin, Part Status="On Hand", Part Type=CAPACITOR, PCB Footprint=C0402, PCB Footprint Status=Checked, Price=0.0072, Purchase Information="13510796878 伊美尔电子", Standard PCB Footprint=0603
C327 C328: library part CAP_NP0603, "贴片陶瓷电容,12pF,5%,50V,COG", Manufacturer Character=中国大陆, Operation Temperature（℃）=-55~125℃, Part Number=117-00-3002, As-Welded=/, Create Date=20130122, Designer=Hujin, Part Status="On Hand", Part Type=CAPACITOR, PCB Footprint=C0402, PCB Footprint Status=Checked, Price=0.0072, Purchase Information="13510796878 伊美尔电子", Standard PCB Footprint=0603
C332: library part CAP_NP, "贴片陶瓷电容,100nF,10%,25V,X5R", Manufacturer Character=中国大陆, Operation Temperature（℃）=-55~85℃, Part Number=117-00-3036, Temperature=-55~125℃, As-Welded=/, Part Status="On Hand", Part Type=CAPACITOR, PCB Footprint=C0402, PCB Footprint Status=Checked, Price=0.0072, Purchase Information="13510796878 伊美尔电子", Standard PCB Footprint=0603
C333: library part CAP_NP0603, "2.2nF,10%,C0603,50V,", Manufacturer Character=中国大陆, Operation Temperature（℃）=-40~85℃, Part Number=117-00-3023, As-Welded=/, Create Date=20130122, Designer=Hujin, Part Status="On Hand", Part Type=CAPACITOR, PCB Footprint=C0603, PCB Footprint Status=Checked, Price=0.0072, Purchase Information="13510796878 伊美尔电子", Standard PCB Footprint=0603
CON0: Manufacturer=广州创龙电子科技有限公司（Tronlong）, Manufacturer Character=中国大陆, Manufacturer PartNumber=SMD_200P_45x45_TL3562, Operation Temperature（℃）=-40~85℃, As-Welded=/, PCB Footprint=SMD_200P_45x45_TL3562
CON2: library part CON3_Dup1, "端子座,3PIN,间距3.81MM,90度,绿色,插件", Manufacturer=慈溪市科发电子有限公司（KEFA）, Manufacturer Character=中国大陆, Manufacturer PartNumber=KF2EDGR-3.81-03P-14, Operation Temperature（℃）=-40~105℃, As-Welded=/, PCB Footprint=CON_3P_3D81_90_MALE_NEW, room=17
CON3: "DC-005,3PIN,90度,母座,2.0MM内径,插件", Manufacturer=广东纳特康电子股份有限公司(natconn), Manufacturer Character=中国大陆, Manufacturer PartNumber=305-OT03SZD001, Operation Temperature（℃）=-30~70℃, Temperature=-30~70, As-Welded=/, PCB Footprint=con_dc005_new, room=dcin
CON4: library part CON8, "端子座,1x8PIN,间距2.00MM,180度,插件", Manufacturer=深圳市长江连接器有限公司（CJT）, Manufacturer Character=中国大陆, Manufacturer PartNumber=A2001WV-8P-3, Operation Temperature（℃）=-40~105℃, As-Welded=/, PCB Footprint=DIP_CON_2D0MM_8P
CON5 CON11: library part "usb 3_0.0 type-c female", "Type-C 母座 90度 16 Pin", Manufacturer=深圳市金航标电子有限公司(kinghelm), Manufacturer Character=中国大陆, Operation Temperature（℃）=-40~85℃, As-Welded=/, Manufacturer PartNumber=KH-TYPE-C-16P, PCB Footprint=TYPE-C_16P_90_SMD, room=10
CON6: library part BATTERY, "2032,纽扣电池座,2PIN,180度,白色,卧式,贴片", Manufacturer=深圳市琦捷电子有限公司（Q&J）, Manufacturer Character=中国大陆, Temperature=-55~85℃, As-Welded=/, Manufacturer PartNumber=CR2032-BS-6-1, PCB Footprint=CON_BATTERY_CR2032, room=4
CON7: library part "PROCONN SDC009-52-D_3", "Micro SD卡座,9PIN,90度,贴片，GE- T-FLASH PUSH TYPE外焊式外壳带弹片1.80H(3U)", Manufacturer=广州高炬电子科技有限公司(TORCH), Manufacturer Character=中国大陆, Operation Temperature（℃）=-40~85℃, As-Welded=/, Manufacturer PartNumber=1060802AR013, PCB Footprint=CON_TF_CARD, Temperature=-40~85℃
CON8: library part CON20A, "简易牛角座,2X10PIN,间距2.54MM,180度,公座,黑色,插件", Manufacturer=深圳特思嘉工业电子有限公司（TXGA）, Manufacturer Character=中国大陆, Manufacturer PartNumber=FBH25401-D20S1004K6K, Operation Temperature（℃）=-40~+105(Ta), As-Welded=/, PCB Footprint=con_2d54_2x10_th_box_90
CON9: library part DB9_1, "DB9,9PIN,90度,公头,黑色,插件", Manufacturer=深圳市灿科盟实业有限公司（ckmtw）, Manufacturer Character=中国大陆, Operation Temperature（℃）=-50~105℃, Temperature=-55~105℃, As-Welded=/, Manufacturer PartNumber=D-DMR009PM-D002, PCB Footprint=CON_DB9, room=RS232
CON10: library part "DOUBLE USB A TYPE", "USB-A-双层座,8PIN,90度,母座,插件", Manufacturer=深圳特思嘉工业电子有限公司（TXGA）, Manufacturer Character=中国大陆, Manufacturer PartNumber=FUS208-FDBW3K, Operation Temperature（℃）=-40~85℃, As-Welded=/, PCB Footprint=CON_USBA_DUAL, room="USB HUB"
CON12: library part KRJ-320DNL_1, "RJ45连接器,14PIN,90度,母座,插件", Manufacturer=东莞市科优达电子科技有限公司（DGKYD）, Manufacturer Character=中国大陆, Operation Temperature（℃）=-40~85℃, As-Welded=/, Manufacturer PartNumber=KRJ-320DNL, PCB Footprint=KRJ-320DNL_14P, Temperature=-40~85℃
CON13: library part "ETHERNET CONNECTER", "RJ45连接器,12PIN,90度,母座,插件", Manufacturer=东莞市科优达电子科技有限公司（DGKYD）, Manufacturer Character=中国大陆, Operation Temperature（℃）=-40~85℃, As-Welded=/, Manufacturer Part Number=KRJ-138EHNL, Manufacturer PartNumber=KRJ-138EHNL, PCB Footprint=CON_YDS_13F-64GYD2PLXNL, room=ecat1, Temperature=-40~85℃
CON18: library part SIM_CARD_2, "Micro SIM卡座,6P,自弹", Manufacturer="深圳市爱特姆科技有限公司( ATOM)", Manufacturer Character=中国大陆, Temperature=-40~85℃, As-Welded=/, Manufacturer PartNumber=SI63C-01200, PCB Footprint=micro-sim
CON19: library part CON_M_1, "NGFF（M.2）金手指连接器，KEY B,高4.2mm", Manufacturer=深圳市连欣科技有限公司, Manufacturer Character=中国大陆, As-Welded=/, Manufacturer PartNumber=APCI0105-P001A, PCB Footprint=conn-smd_apci0103-p001a
CON24: library part 2C_Conn_HDMI_TypeA, "HDMI接口，19PIN，侧立，90度", Manufacturer=深圳特思嘉工业电子有限公司（TXGA）, Manufacturer Character=中国大陆, Mfr=FCI, MfrNum=10029449-001RLF, Operation Temperature（℃）=-40~85℃, PartName=Conn_HDMI_A, Temperature=-25~75℃, TIIntPartnumber=2C0085, Cost10K=0.37, Cost100=0.91, DescriptiveText="Connector HDMI Type A RA", Manufacturer PartNumber=FHD14-FDB300K6K, PCB Footprint=SMD_Ratbd, Remark=HDMI接口，19PIN，侧立，90度, Vendor=Digikey
D1: library part MBRB1045_0, "肖特基二极管,VR=60V,IF=10A,VF=0.75V@5A,两路", Manufacturer=辽宁芯诺电子科技有限公司（XINNUO）, Manufacturer Character=中国大陆, Operation Temperature（℃）=-55~150℃, As-Welded=/, Manufacturer PartNumber=MBR1060CD, PCB Footprint=TO-252, Temperature=-55~150℃
D2: library part DIODE-TRIG, "TVS二极管,VRWM=16V,VBR=17.8V,一组,双向", Manufacturer=江苏长晶科技有限公司（JSCJ）, Manufacturer Character=中国大陆, Operation Temperature（℃）=-55~150℃, As-Welded=/, Manufacturer PartNumber=SMBJ16CA, PCB Footprint=SMB, room=DCIN, Temperature=-55~150℃
D3 D9 D23 D24: library part "DIODE BREAKDOWN_2", "TVS二极管,VRWM=5V,VBR=6V,一组,双向,30KV,30KV", Manufacturer=上海雷卯电子科技有限公司（Leiditech）, Manufacturer Character=中国大陆, Manufacturer Part Number=PESD3V3L1BA, Operation Temperature（℃）=-55~125℃, Temperature=-55~155℃, As-Welded=/, Manufacturer PartNumber=LC05CI, PCB Footprint=SOD323_BI, room=KEY
D4: library part DIODE-BI, "TVS二极管,VRWM=5V,VBR=6V,一组,双向,30KV,30KV", Manufacturer=上海雷卯电子科技有限公司（Leiditech）, Manufacturer Character=中国大陆, Manufacturer Part Number=PESD3V3L1BA, Operation Temperature（℃）=-55~125℃, Temperature=-55~155℃, As-Welded=/, Manufacturer PartNumber=LC05CI, PCB Footprint=SOD323_BI, room=KEY
D5 D6 D7: library part "DIODE BREAKDOWN_2", "TVS二极管,VRWM=5V,VBR=6V,一组,双向,30KV,30KV", Manufacturer=上海雷卯电子科技有限公司（Leiditech）, Manufacturer Character=中国大陆, Manufacturer Part Number=PESD3V3L1BA, Operation Temperature（℃）=-55~125℃, Temperature=-60~150℃, As-Welded=/, Manufacturer PartNumber=LC05CI, PCB Footprint=SOD323_BI, room=KEY
D8: library part Diode200mA250V_1, "肖特基二极管,VR=40V,IF=350mA,VF=0.37V@20mA,trr=10ns", Manufacturer=江苏长晶科技有限公司（JSCJ）, Manufacturer Character=中国大陆, Mfr="On Semiconductor", MfrNum=MMSD103T1G, Operation Temperature（℃）=-40~125℃, PartName=Diode200mA250V, Temperature=-55~150℃, TIIntPartnumber=1E0013, As-Welded=/, Cost10K=0.07, Cost100=0.23, Descriptive_Text="Diode 200mA 250V 1.25V Forward Drop", DescriptiveText="Diode 200mA 250V 1.25V Forward Drop", Manufacturer PartNumber=SD103AW, PCB Footprint=smd123, Vendor=Digikey
D10 D20 D21 D22: library part Diode200mA250V_2, "肖特基二极管,VR=40V,IF=1A,VF=0.6V@1A", Manufacturer=江苏长晶科技有限公司（JSCJ）, Manufacturer Character=中国大陆, Mfr="On Semiconductor", MfrNum=MMSD103T1G, Operation Temperature（℃）=-55~125℃, PartName=Diode200mA250V, Temperature=-40~125℃, TIIntPartnumber=1E0013, As-Welded=/, Cost10K=0.07, Cost100=0.23, Descriptive_Text="Diode 200mA 250V 1.25V Forward Drop", DescriptiveText="Diode 200mA 250V 1.25V Forward Drop", Manufacturer PartNumber=B5819WS-SL, PCB Footprint=smd123, Vendor=Digikey
D11: library part Diode200mA250V, "肖特基二极管,VR=40V,IF=1A,VF=0.6V@1A", Manufacturer=江苏长晶科技有限公司（JSCJ）, Manufacturer Character=中国大陆, Mfr="On Semiconductor", MfrNum=MMSD103T1G, Operation Temperature（℃）=-55~125℃, Temperature=-55~150, TIIntPartnumber=1E0013, As-Welded=/, Cost10K=0.07, Cost100=0.23, Descriptive_Text="Diode 200mA 250V 1.25V Forward Drop", DescriptiveText="Diode 200mA 250V 1.25V Forward Drop", Manufacturer PartNumber=B5819WS-SL, PartName=Diode200mA250V, PCB Footprint=smd123, Vendor=Digikey
D25: library part Diode200mA250V_2, "肖特基二极管,VR=40V,IF=1A,VF=0.6V@1A", Manufacturer=江苏长晶科技股份有限公司（JSCJ）, Manufacturer Character=中国大陆, Mfr="On Semiconductor", MfrNum=MMSD103T1G, Operation Temperature（℃）=-55~125℃, PartName=Diode200mA250V, Temperature=-40~125℃, TIIntPartnumber=1E0013, As-Welded=/, Cost10K=0.07, Cost100=0.23, Descriptive_Text="Diode 200mA 250V 1.25V Forward Drop", DescriptiveText="Diode 200mA 250V 1.25V Forward Drop", Manufacturer PartNumber=B5819WS-SL, PCB Footprint=smd123, Vendor=Digikey
F1: library part FUSE, "保险丝，Vmax=72V,Imax=50A,Ihold=2A", Manufacturer=东莞市竞沃电子科技有限公司（TLC）, Manufacturer Character=中国大陆, Manufacturer PartNumber=F12T2, Operation Temperature（℃）=-55~125℃, As-Welded=/, PCB Footprint=F1206, Temperature=-55~125℃
F2: library part FUSE, "保险丝，Vmax=72V,Imax=50A,Ihold=3A", Manufacturer=东莞市竞沃电子科技有限公司（TLC）, Manufacturer Character=中国大陆, Manufacturer PartNumber=F12T3, Operation Temperature（℃）=-55~125℃, As-Welded=/, PCB Footprint=F1206, Temperature=-55~125℃
FB1 FB2: library part BEAD, "磁珠,50mΩ,2.2A,220R@100MHz", Manufacturer=深圳顺络电子股份有限公司（Sunlord）, Manufacturer Character=中国大陆, Manufacturer PartNumber=UPZ1608U221-2R2TF, Manufacturer PN=BLM18PG181SN1, Operation Temperature（℃）=-55~125℃, Temperature=-55~+125(Ta), As-Welded=/, Created by=YTL, Part Type=BEAD, PCB Footprint=L0603, Priority=A, RK PN=BLM18PG181SN1
FB3 FB4 FB5: library part "FERRITE BEAD_Dup2", "磁珠,50mΩ,2.2A,220R@100MHz", Manufacturer=深圳顺络电子股份有限公司（Sunlord）, Manufacturer Character=中国大陆, Manufacturer PartNumber=UPZ1608U221-2R2TF, Operation Temperature（℃）=-55~125℃, PCB Footprint=L0603, Temperature=-55~125℃
  FB3: As-Welded=/
  FB4: As-Welded=/, room=RGMII1
  FB5: As-Welded=DNP, room=RGMII1
FB6 FB17: library part FB_0, "磁珠,50mΩ,2.2A,220R@100MHz", Manufacturer=深圳顺络电子股份有限公司（Sunlord）, Manufacturer Character=中国大陆, Manufacturer PartNumber=UPZ1608U221-2R2TF, Operation Temperature（℃）=-55~125℃, PCB Footprint=L0603, Temperature=-55~125℃
  FB6: As-Welded=/
  FB17: As-Welded=DNP, room=6
FB7 FB9 FB10: library part "FERRITE BEAD_Dup1", "磁珠,50mΩ,2.2A,220R@100MHz", Manufacturer=深圳顺络电子股份有限公司（Sunlord）, Manufacturer Character=中国大陆, Manufacturer PartNumber=UPZ1608U221-2R2TF, Operation Temperature（℃）=-55~125℃, Temperature=-55~+125(Ta), As-Welded=/, PCB Footprint=L0603, room="USB HUB"
FB8 FB11: library part "FERRITE BEAD_Dup1", "磁珠,50mΩ,2.2A,220R@100MHz", Manufacturer=深圳顺络电子股份有限公司（Sunlord）, Manufacturer Character=中国大陆, Manufacturer PartNumber=UPZ1608U221-2R2TF, Operation Temperature（℃）=-55~125℃, As-Welded=DNP, PCB Footprint=L0603, room="USB HUB", Temperature=-55~125℃
FB12: library part "FERRITE BEAD_Dup2", "磁珠,50mΩ,2.2A,220R@100MHz", Manufacturer=深圳顺络电子股份有限公司（Sunlord）, Manufacturer Character=中国大陆, Manufacturer PartNumber=UPZ1608U221-2R2TF, Operation Temperature（℃）=-55~125℃, Temperature=-55~125, As-Welded=/, PCB Footprint=L0603
FB13 FB14: library part "FERRITE BEAD_Dup2", "磁珠,50mΩ,2.2A,220R@100MHz", Manufacturer=深圳顺络电子股份有限公司（Sunlord）, Manufacturer Character=中国大陆, Manufacturer PartNumber=UPZ1608U221-2R2TF, Operation Temperature（℃）=-55~125℃, Temperature=-40~85℃, As-Welded=/, PCB Footprint=L0603
FB20 FB21 FB22 FB23 FB24 FB25 FB26 FB27 FB28: library part "FERRITE BEAD", "磁珠,50mΩ,2.2A,220R@100MHz", Manufacturer=深圳顺络电子股份有限公司（Sunlord）, Manufacturer Character=中国大陆, Manufacturer PartNumber=UPZ1608U221-2R2TF, Operation Temperature（℃）=-55~125℃, Part Number=647-01-3069, Part Status="On Hand", Part Type=BEAD, PCB Footprint=L0603, PCB Footprint Status=Checked, Price=0.011, Purchase Information="07558255526 小商行电子", Standard PCB Footprint=0603, Temperature=-55~125℃
  FB20 FB21 FB22 FB23 FB24 FB25 FB26 FB28: As-Welded=/
  FB27: As-Welded=DNP
H1 H2 H3 H4 H5 H6: Manufacturer Character=中国大陆, As-Welded=DNP, PCB Footprint=MHOLE_C200D125
J2: library part CON6_Dup1, "XH2.54  6P 连接器 180度", Manufacturer=深圳市长江连接器有限公司（CJT）, Manufacturer Character=中国大陆, Operation Temperature（℃）=-25~85℃, As-Welded=/, Manufacturer PartNumber=A2501WV-6P, PCB Footprint=CON_XH_1x6P_2D54_H_M_DIP, Temperature=-25~85℃
J3: library part CON2_0, "排针,1x2PIN,间距2.54MM,180度,黑色,插件", Manufacturer=深圳市金航标电子有限公司(kinghelm), Manufacturer Character=中国大陆, Operation Temperature（℃）=-55~105℃, Temperature=-40~105℃, As-Welded=/, Manufacturer PartNumber=KH-2.54PH180-1X2P-L11.5, PCB Footprint=header_1x2p_2d54_male
J4: library part CON3_Dup2, "排针,1x3PIN,间距2.54MM,180度,黑色,插件", Manufacturer=深圳市金航标电子有限公司(kinghelm), Manufacturer Character=中国大陆, Operation Temperature（℃）=-55~105℃, As-Welded=/, Manufacturer PartNumber=KH-2.54PH180-1X3P-L11.5, PCB Footprint=CON3_2D254, room=DAC, Temperature=-55~105℃
J5: library part CON3, "端子座,3PIN,间距2.54MM,180度,2510连接器,白色,插件", Manufacturer=深圳特思嘉工业电子有限公司（TXGA）, Manufacturer Character=中国大陆, Temperature=-25~85℃, As-Welded=/, Manufacturer PartNumber=FWF25401-S03S22W5B, PCB Footprint=mol22-23-2031
J6: library part CON10_0, "端子座,12PIN,间距3.81MM,90度,插件", Manufacturer=慈溪市科发电子有限公司（KEFA）, Manufacturer Character=中国大陆, Manufacturer PartNumber=KF2EDGR-3.81-12P, Operation Temperature（℃）=-40~105℃, As-Welded=/, PCB Footprint=KF2EDGR-3d81-12P, Temperature=-40~105℃
J7: library part CON6, "端子座,6PIN,间距3.81MM,90度,插件", Manufacturer=慈溪市科发电子有限公司（KEFA）, Manufacturer Character=中国大陆, Manufacturer PartNumber=KF2EDGR-3.81-06P, Operation Temperature（℃）=-40~105℃, As-Welded=/, PCB Footprint=kf2eg_3_81-6p
J15: library part CON12A, "排母,2X6PIN,间距2.54MM,180度,插件", Manufacturer=深圳市长江连接器有限公司（CJT）, Manufacturer Character=中国大陆, Manufacturer PartNumber=A2541HWV-2x6P, Temperature=-55~105℃, As-Welded=/, PCB Footprint=header_2x6_2d54_male
KEY1 KEY2 KEY3 KEY4 KEY5: library part "SW PUSHBUTTON-SPST SHIELD_0", "四脚方形按键6.4x6.5，2.5mm+1.8mm，白色硅胶键帽", Manufacturer=广东星坤科技股份有限公司（XKB）, Manufacturer Character=中国大陆, Operation Temperature（℃）=-40~85℃, As-Welded=/, Manufacturer PartNumber=TS-1158B-B-B-W, PCB Footprint=TS-1158B-B-B-W
  KEY2: room=KEY, Temperature=-40~85℃
  KEY3 KEY4 KEY5: room=KEY
L1 L2 L3 L4 L5 L8: library part INDUCTOR, "贴片功率电感,2.2uH,0.035Ω,Isat=6.5A,Irms=5A", Current=5A, Manufacturer=深圳市科达嘉电子有限公司（CODACA）, Manufacturer Character=中国大陆, Operation Temperature（℃）=-40~125℃, As-Welded=/, Manufacturer PartNumber=CSAB0518-2R2M, Parameter=L2520，奇力新一体成型电感，最大额定电流3A，内阻65毫欧，20%, PCB Footprint=SMD_CSAB0518, Temperature=-40~125℃
LED0: library part LED, "直插式发光二极管,红色,带灯座", Manufacturer=深圳市巨弘光电有限公司（JUHLIGHT）, Manufacturer Character=中国大陆, Manufacturer PartNumber=JH-03B2RD1E-DL, Operation Temperature（℃）=-40~100℃, Temperature=-40~105℃, As-Welded=/, PCB Footprint=CON_2P_3MM, room=LED
LED1 LED2: library part LED_0, "直插式发光二极管,绿色,带灯座", Manufacturer=深圳市巨弘光电有限公司（JUHLIGHT）, Manufacturer Character=中国大陆, Manufacturer PartNumber=JH-03B2YG1E-DL, Operation Temperature（℃）=-40~100℃, Temperature=-40~105℃, As-Welded=/, PCB Footprint=CON_2P_3MM
LED4: library part LED_0, "贴片式发光二极管,黄绿色,普亮", Manufacturer=东莞市亿晶源光电科技有限公司（ekinglux）, Manufacturer Character=中国大陆, Manufacturer PartNumber=E6C0603YGAC1UDA, Operation Temperature（℃）=-40~90℃, Temperature=-55~85℃, As-Welded=/, PCB Footprint=D0603
MK1: library part B_S-2W_1, "DC-DC隔离电源,B0505S-1WR3L,输入电压5V,输出电压5V,输出电流max/min=200/20mA,效率max/min=78/82", Manufacturer=广州金升阳科技有限公司（MORNSUN）, Manufacturer Character=中国大陆, Operation Temperature（℃）=-40~105℃, Temperature=-40~85℃, As-Welded=/, Manufacturer PartNumber=B0505S-1WR3L, PCB Footprint=DIP4_B0505S_1W
Q1 Q2: library part WPM3021, "MOSFET,P沟道,VDSS=-30V,VGSS=±25V,ID=-13A,PD=3.8W,VGS(th)=-3V", Manufacturer=上海韦尔半导体股份有限公司（WILLSEMI）, Manufacturer Character=中国大陆, Operation Temperature（℃）=-55~150℃, Temperature=-40~85℃, As-Welded=/, Manufacturer PartNumber=WPM3021-8/TR, PCB Footprint=PSOPSOP-8L
Q3 Q4: library part "MOSFET P SOT_Dup1", "MOSFET,P沟道,VDSS=-30V,VGSS=±12V,ID=-4.2A,PD=0.35W,VGS(th)=-1.3V", Manufacturer=江苏长晶科技有限公司（JSCJ）, Manufacturer Character=中国大陆, Operation Temperature（℃）=-55~150℃, As-Welded=/, Manufacturer Part Number=CJ3401, Manufacturer PartNumber=CJ3401, PCB Footprint=SOT23-3, room=DCIN, Temperature=-55~150℃
Q5 Q6 Q8 Q9 Q14: library part MMBT3904/SOT, "BJT,NPN,Vceo=40V,Ic=200mA,fT=300MHz,PD=200mW", Manufacturer=江苏长晶科技有限公司（JSCJ）, Manufacturer Character=中国大陆, Operation Temperature（℃）=-55~150℃, As-Welded=/, Manufacturer PartNumber=MMBT3904, PCB Footprint=SOT23-3_DBZ3, Temperature=-55~150℃
Q7: library part "MOSFET P SOT", "MOSFET,P沟道,VDSS=-30V,VGSS=±12V,ID=-4.2A,PD=0.35W,VGS(th)=-1.3V", Manufacturer=江苏长晶科技有限公司（JSCJ）, Manufacturer Character=中国大陆, Operation Temperature（℃）=-55~150℃, As-Welded=/, Manufacturer Part Number=CJ3401, Manufacturer PartNumber=CJ3401, PCB Footprint=SOT23-3, room=DCIN, Temperature=-55~150℃
Q12: library part MMBT3904/SOT_1, "MOSFET,N沟道,VDSS=30V,VGSS=±12V,ID=5.8A,PD=0.35W,VGS(th)=1.4V", Manufacturer=江苏长晶科技股份有限公司（JSCJ）, Manufacturer Character=中国大陆, Operation Temperature（℃）=-55~150℃, As-Welded=/, Manufacturer PartNumber=CJ3400, PCB Footprint=SOT23-3_DBZ3, room=DSP_LED
Q13: library part "MOSFET N SOT", "MOSFET,N沟道,VDSS=30V,VGSS=±12V,ID=5.8A,PD=0.35W,VGS(th)=1.4V", Manufacturer=江苏长晶科技股份有限公司（JSCJ）, Manufacturer Character=中国大陆, Operation Temperature（℃）=-55~150℃, As-Welded=/, Manufacturer PartNumber=CJ3400, PCB Footprint=SOT23-3_DBZ3, room=DSP_LED, Temperature=-55~150℃
R1 R2 R420 R421 R454 R455: library part Resistor_Dup3, "贴片电阻,33R,±1%,1/16W", Manufacturer Character=中国大陆, Operation Temperature（℃）=-55~155℃, Temperature=-55~125℃, As-Welded=/, CLASS=DISCRETE, PCB Footprint=R0402, room=RGMII1
R3: library part Resistor_Dup3, "贴片电阻,22R,±1%,1/16W", Manufacturer Character=中国大陆, Operation Temperature（℃）=-55~155℃, Temperature=-55~125℃, As-Welded=/, CLASS=DISCRETE, PCB Footprint=R0402, room=RGMII1
R4 R5 R51 R53 R165: library part Resistor_Dup3, "贴片电阻,2.2K,±1%,1/10W", Manufacturer Character=中国大陆, Operation Temperature（℃）=-55~155℃, As-Welded=/, CLASS=DISCRETE, PCB Footprint=R0603
  R4 R5: room=DCIN
R6 R7 R16 R18 R20 R21 R24 R66 R67 R68 R69 R70 R71 R73 R74 R75 R144 R146 R158 R160 R173 R179 R198 R199 R200 R201 R202 R203 R205 R206 R207 R210 R211 R212 R213 R214 R215 R216 R217 R218 R390 R391 R400 R401: library part Resistor_Dup3, "贴片电阻,4.7K,±1%,1/16W", Manufacturer Character=中国大陆, Operation Temperature（℃）=-55~155℃, CLASS=DISCRETE, PCB Footprint=R0402
  R6 R7: As-Welded=DNP, room=DCIN
  R16 R18 R21 R24 R66 R67 R68 R75 R144 R158: As-Welded=/, Temperature=-55~155℃
  R20: As-Welded=/, room=DCIN
  R69 R70 R71 R73 R74 R146 R160: As-Welded=DNP, Temperature=-55~155℃
  R173 R179 R203 R210 R211 R212 R213 R214 R215 R216 R217 R390 R391: As-Welded=/
  R198 R199 R200 R201 R202 R205 R206 R207 R218 R400 R401: As-Welded=DNP
R8 R9: library part Resistor_Dup3, "贴片电阻,2.2R,±1%,1/16W", Manufacturer Character=中国大陆, Operation Temperature（℃）=-55~155℃, As-Welded=/, CLASS=DISCRETE, PCB Footprint=R0402, room=RGMII1
R10 R11 R12 R13 R14 R15 R62 R63 R85 R185 R187 R188 R189 R190 R191 R280 R282 R283: library part Resistor_Dup3, "贴片电阻,22R,±1%,1/16W", Manufacturer Character=中国大陆, Operation Temperature（℃）=-55~155℃, CLASS=DISCRETE, PCB Footprint=R0402
  R10 R11 R12 R13 R14: As-Welded=/, room=RGMII1
  R15: As-Welded=DNP, room=RGMII1
  R62 R63 R85 R280 R282 R283: As-Welded=/, Temperature=-55~155℃
  R185 R187 R188 R189 R190 R191: As-Welded=/, room=RS232
R17 R31 R40 R315: library part Resistor_Dup3, "贴片电阻,12.4K,±1%,1/16W", Manufacturer Character=中国大陆, Operation Temperature（℃）=-55~155℃, As-Welded=/, CLASS=DISCRETE, PCB Footprint=R0402, Temperature=-55~155℃
R19: library part Resistor_Dup3, "贴片电阻,2R,±1%,1/3W", Manufacturer Character=中国大陆, Operation Temperature（℃）=-55~155℃, As-Welded=/, CLASS=DISCRETE, PCB Footprint=R1210
R22: library part Resistor_Dup3, "贴片电阻,12.4K,±1%,1/10W", Manufacturer Character=中国大陆, Operation Temperature（℃）=-55~155℃, As-Welded=/, CLASS=DISCRETE, PCB Footprint=R0603
R23 R43 R56 R58 R59 R60 R76 R133 R134 R135 R147 R148 R149 R396 R397 R398 R402 R403 R439: library part Resistor_Dup3, "0R,±1%,R0402,≥1/16W", Manufacturer Character=中国大陆, Operation Temperature（℃）=-55~155℃, As-Welded=/, CLASS=DISCRETE, PCB Footprint=R0402
  R56 R58 R59 R60: room=10
R25 R27 R299 R300 R301 R404 R406 R407: library part Resistor_Dup3, "贴片电阻,100K,±1%,1/16W", Manufacturer Character=中国大陆, Operation Temperature（℃）=-55~155℃, CLASS=DISCRETE, PCB Footprint=R0402
  R25 R27: As-Welded=/, Temperature=-55~155℃
  R299: As-Welded=DNP, room="USB HUB"
  R300 R301: As-Welded=/, room="USB HUB"
  R404 R406 R407: As-Welded=/
R26 R44: library part Resistor_Dup3, "贴片电阻,120R,±1%,1/8W", Manufacturer Character=中国大陆, Operation Temperature（℃）=-55~155℃, As-Welded=/, CLASS=DISCRETE, PCB Footprint=R0805, room=DCIN, Temperature=-55~155℃
R28 R36 R38 R314: library part Resistor_Dup3, "贴片电阻,56K,±1%,1/16W", Manufacturer Character=中国大陆, Operation Temperature（℃）=-55~155℃, As-Welded=/, CLASS=DISCRETE, PCB Footprint=R0402, Temperature=-55~155℃
R29: library part Resistor_Dup3, "贴片电阻,73.2K,±1%,1/16W", Manufacturer Character=中国大陆, Operation Temperature（℃）=-55~155℃, As-Welded=/, CLASS=DISCRETE, PCB Footprint=R0402, Temperature=-55~155℃